# Altium PCB main_fourlayers.PcbDoc
Units mil, origin at the board's own origin, x right, y up, seen from the top; angles counter-clockwise.
Board outline 6000 x 4000 mil, 4 copper layers (Top Layer, Signal Layer 1, Signal Layer 2, Bottom Layer), stack 30.634 mil thick; 34 components, 35 nets, 218 pads, 0 vias.
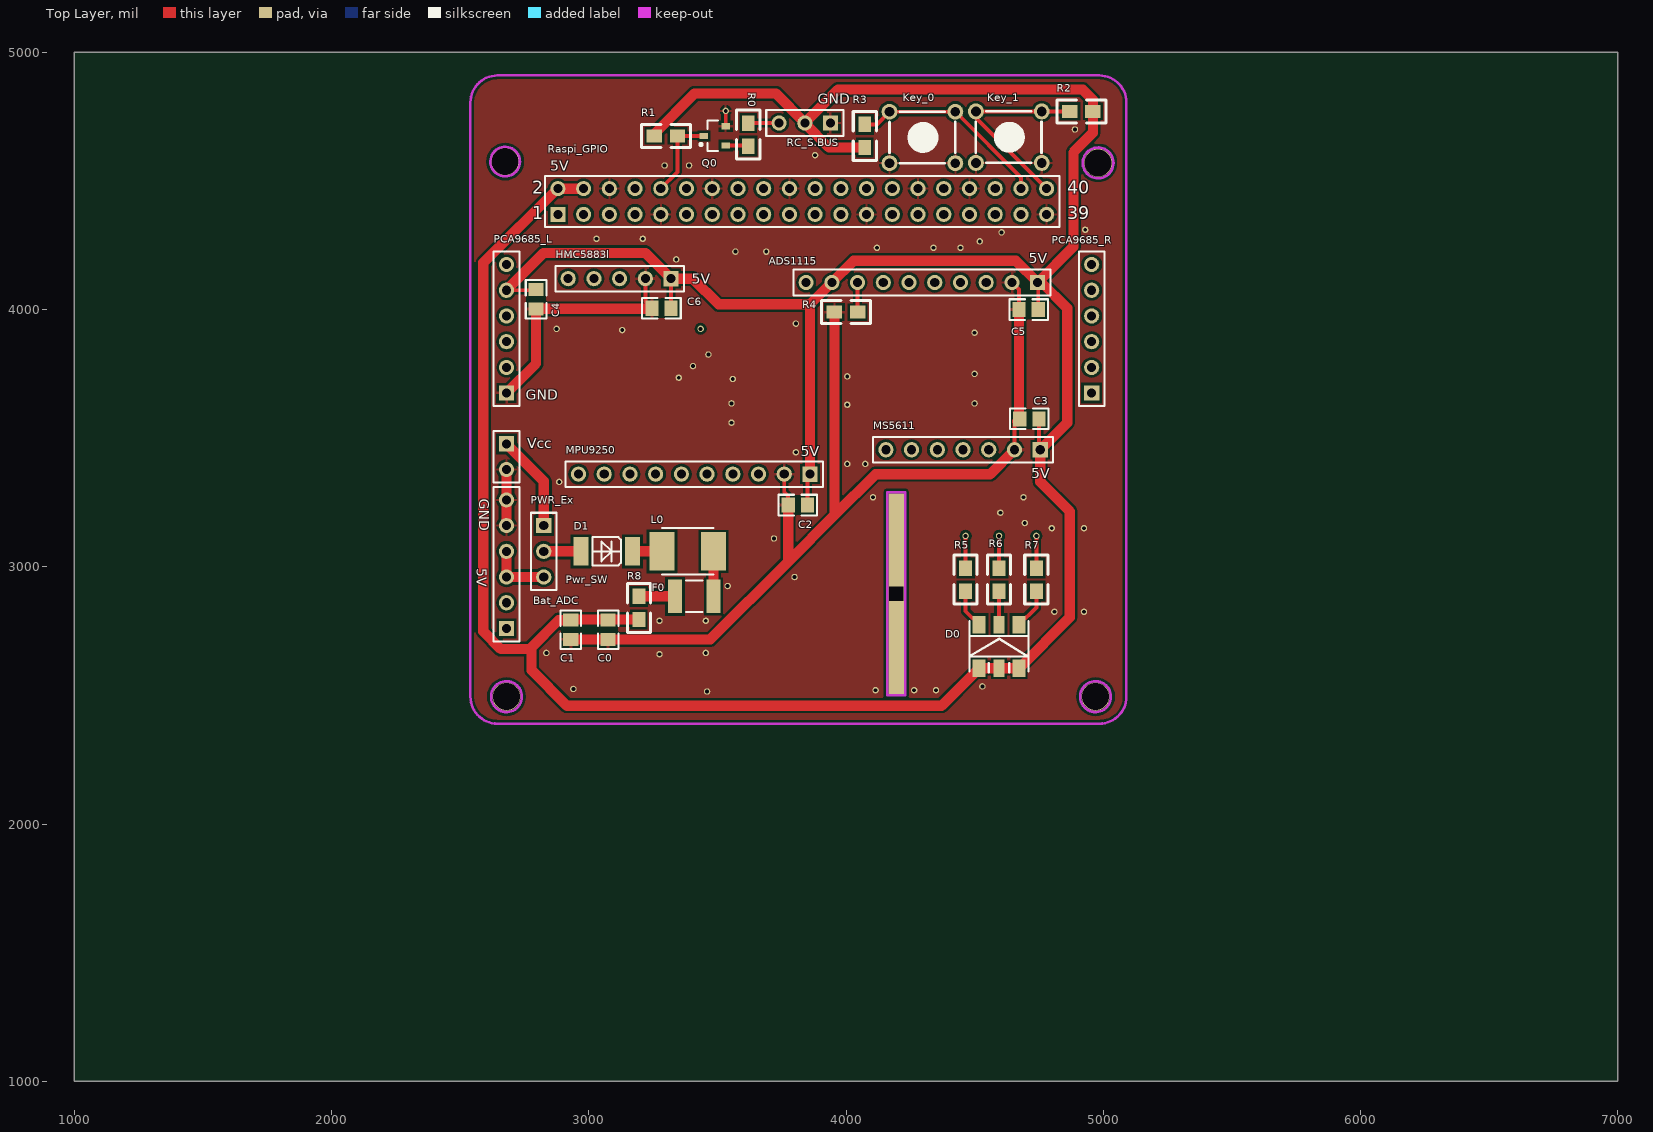
[diagram p0: Top Layer view]
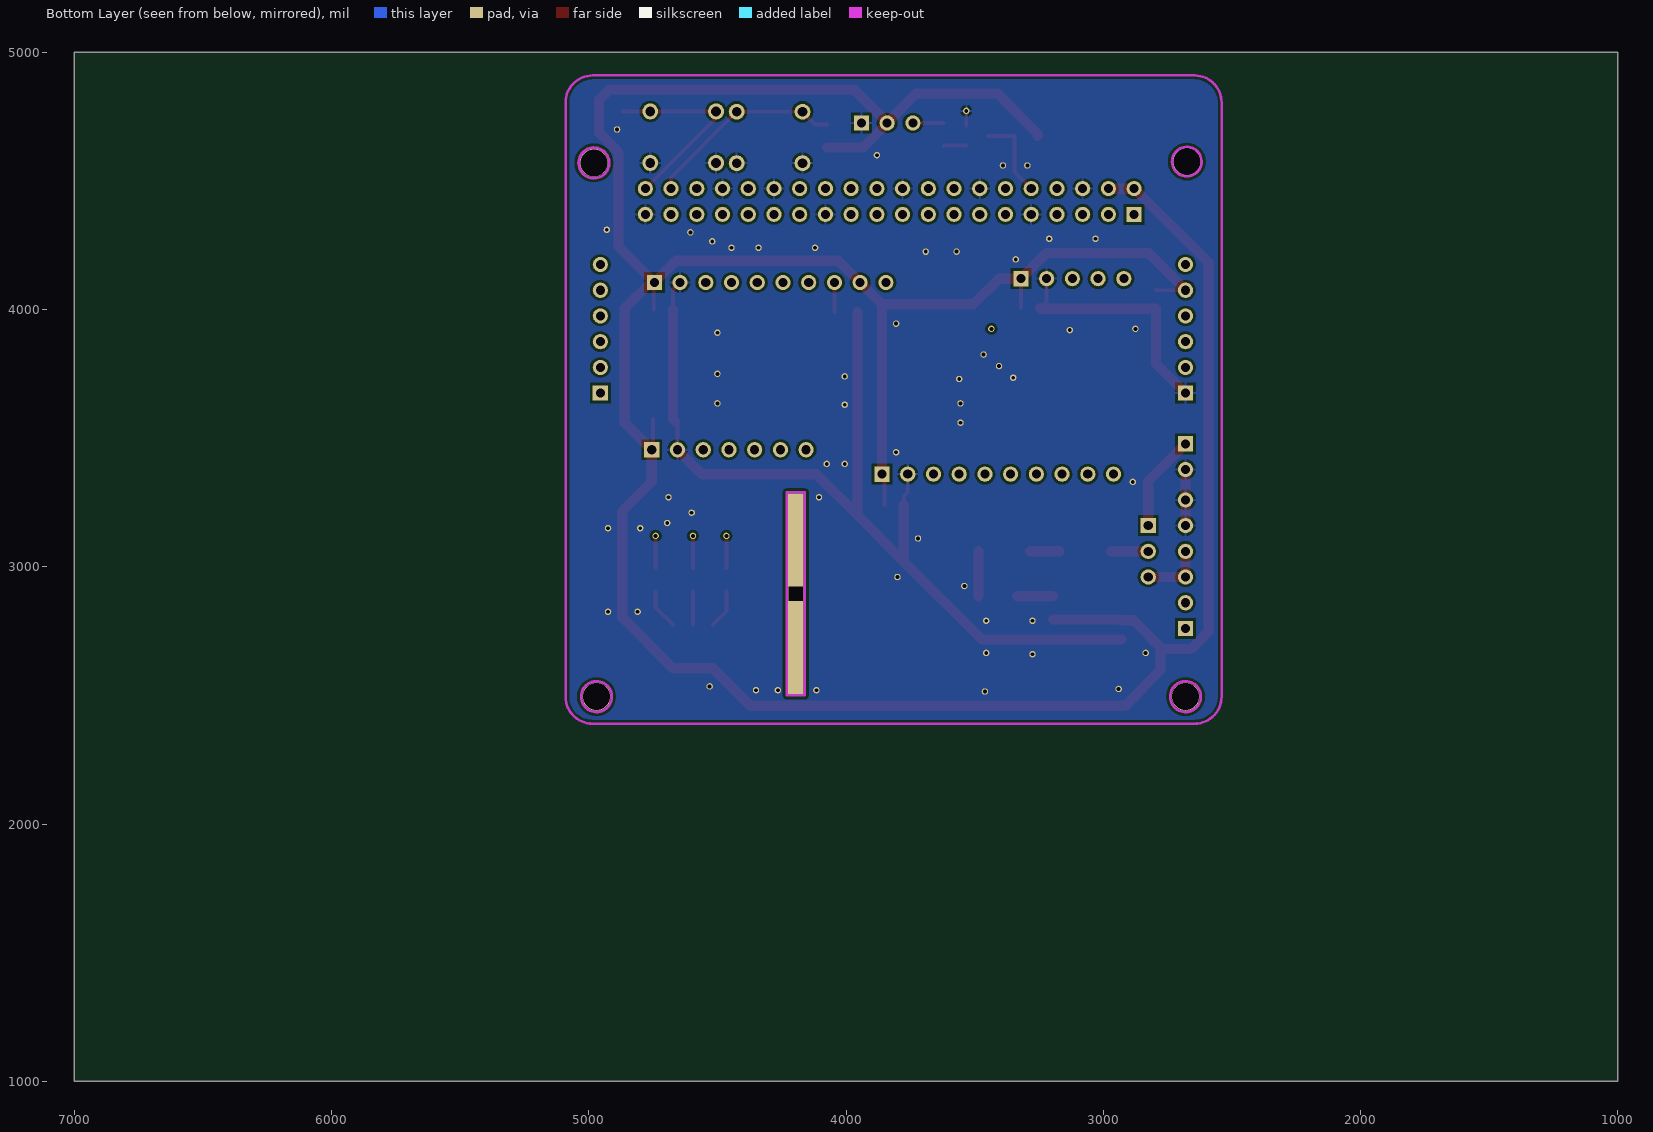
[diagram p1: Bottom Layer view, seen from below]
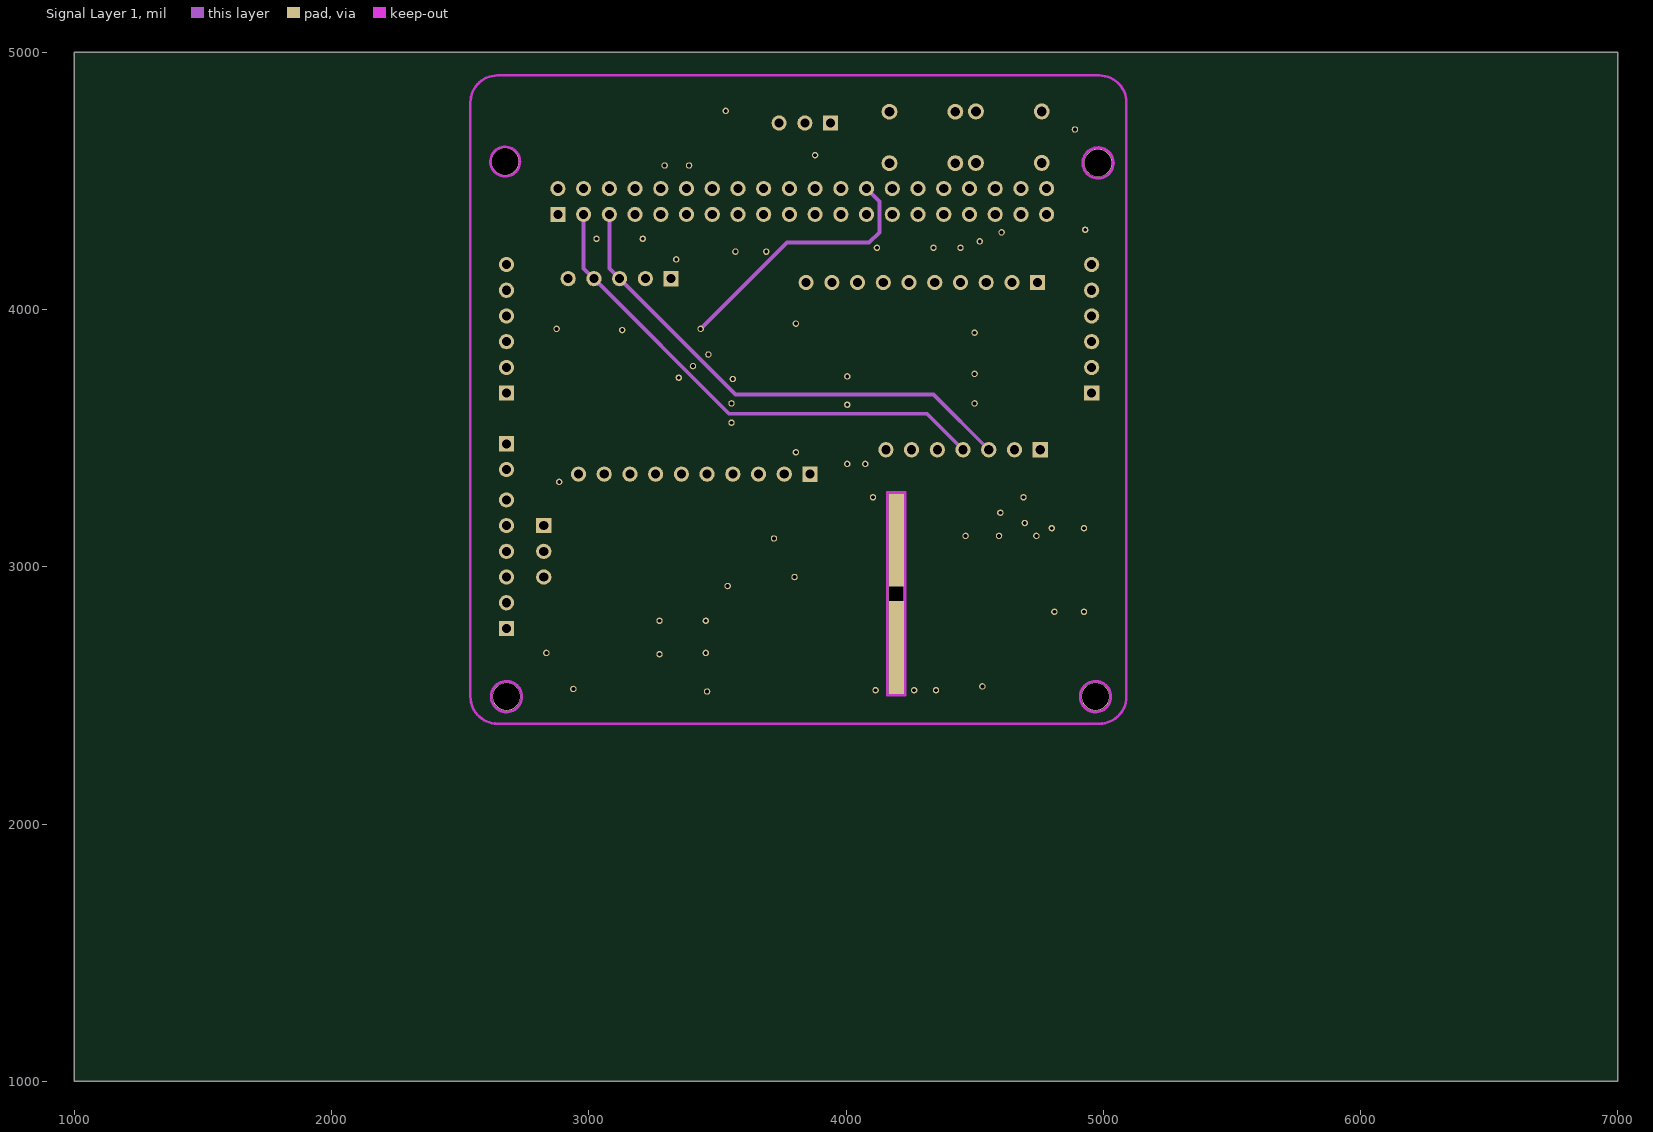
[diagram p2: Signal Layer 1]
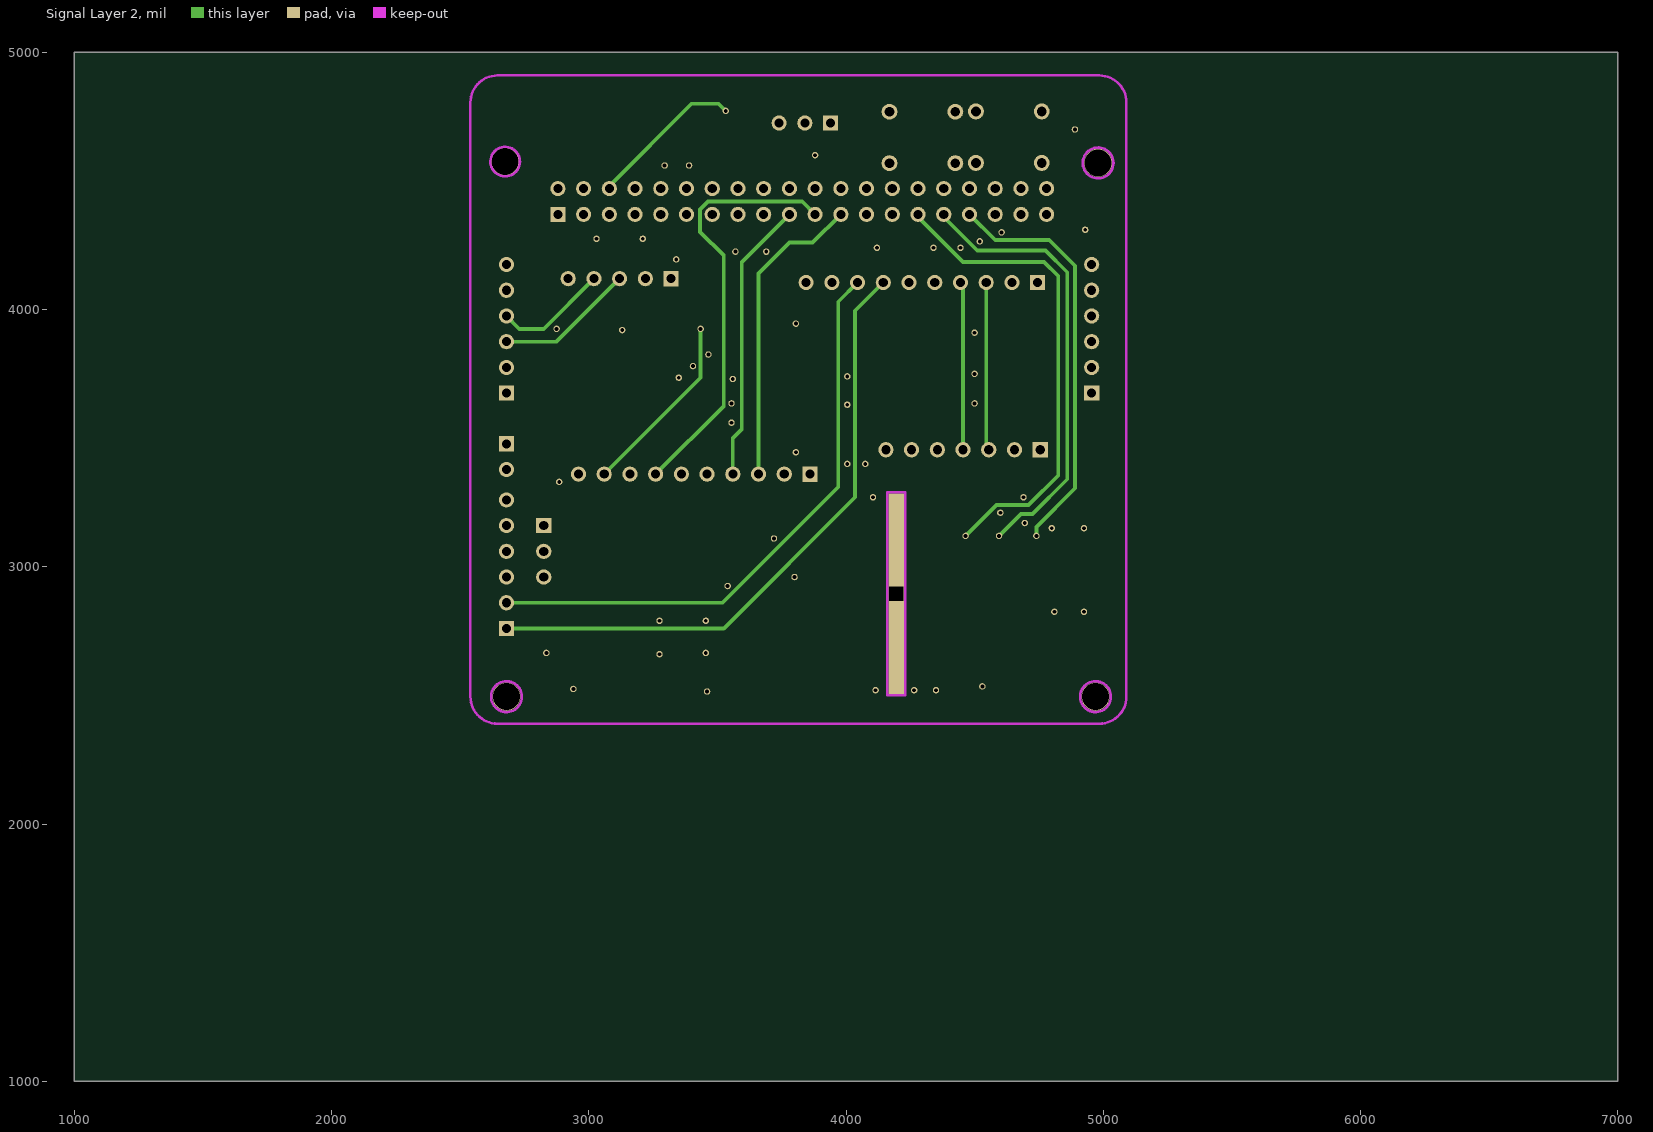
[diagram p3: Signal Layer 2]

## Layer stack, top to bottom
Top Solder: solder mask 0.4, Solder Resist, Dk 3.5
Top Layer: signal copper 1.4
Dielectric 1: core 10, FR-4, Dk 4.2
Signal Layer 1: signal copper 1.417
Dielectric 3: prepreg 5, Dk 4.2
Signal Layer 2: signal copper 1.417
Dielectric 2: core 10, Dk 4.2
Bottom Layer: signal copper 1.4
Bottom Solder: solder mask 0.4, Solder Resist, Dk 3.5

## Board outline
1000,1000 7000,1000 7000,5000 1000,5000

## Design rules (kind name [scope] priority, off if disabled: settings)
Clearance [All] p1: gap=10
PolygonConnect [All] p1: connectstyle=Relief reliefconductorwidth=10 reliefentries=4 polygonreliefangle="90 Angle" airgapwidth=10
RoutingVias [All] p1: holewidth=28 width=50 viastyle="Through Hole" minholewidth=28 minwidth=50 maxholewidth=28 maxwidth=50
SolderMaskExpansion [All] p1: expansion=4
Width [All] p1: maxlimit=50 minlimit=15 preferedwidth=15
30 further rules are at their usual default settings.

## Classes and differential pairs
component class Rpi_GPIO: Raspi_GPIO
component class Sensors: ADS1115 C2 C3 C4 C5 C6 D0 HMC5883l Key_0 Key_1 MPU9250 MS5611 PCA9685_L PCA9685_R Q0 R0 R1 R2 R3 R4 R5 R6 R7 RC_S.BUS
component class etc: Bat_ADC C0 C1 D1 F0 L0 PWR_Ex Pwr_SW R8

## Components (designator, comment, footprint, x,y, rotation, side; value= is the part's Value field where it differs from the comment)
ADS1115 "第一轮先用于测试" HDR1X10 4745,4105.05 r180 top
Bat_ADC "最好是GH接头的，但是考虑到焊接难度，还是修改电压计的线" HDR1X6 2680,2760 r90 top
C0 "Cap" 0805-1 3075,2755 r90 top
C1 "Cap" 0805-1 2930,2755 r90 top
C2 "Cap" 0805-1 3812.6,3240 r0 top
C3 "Cap" 0805-1 4712.6,3575 r0 top
C4 "Cap" 0805-1 2795,4040 r90 top
C5 "Cap" 0805-1 4710,4000 r0 top
C6 "Cap" 0805-1 3282.6,4005 r0 top
D0 "LED-RGB" LED_5050_RGB 4605,2710.35 r90 top
D1 "4007" MELF 3070,3060 r0 top
F0 "3A，如果电供不上就直接短接" 1812 3410,2885.19 r180 top
HMC5883l "" HDR1X5 3320,4120 r180 top
Key_0 "" KEY_M 4169.09,4768.95 r0 top
Key_1 "" KEY_M 4505.01,4770 r0 top
L0 "Inductor" L-SMD-3 3385,3060 r0 top
MPU9250 "Header 10" HDR1X10 3860,3360 r180 top
MS5611 "" HDR1X7 4755,3455 r180 top
PCA9685_L "Header 6" HDR1X6 2680,3675 r90 top
PCA9685_R "Header 6" HDR1X6 4955,3675 r90 top
PWR_Ex "额外电源供电，最好使用接线端子" HDR1X2 2680,3477.88 r270 top
Pwr_SW "通过跳线帽选择从飞机电池供电还是额外供电" HDR1X3 2825,3160 r270 top
Q0 "9013" SOT23_L 3490,4675 r180 top
R0 "Res2" 0805 3619.94,4635 r90 top
R1 "Res2" 0805 3345,4675 r180 top
R2 "Res2" 0805 4870,4770 r0 top
R3 "Res2" 0805 4073.15,4720 r270 top
R4 "Res2" 0805 3955,3990 r0 top
R5 "Res2" 0805 4465.06,2995 r270 top
R6 "Res2" 0805 4595.06,2995 r270 top
R7 "Res2" 0805 4740,2995 r270 top
R8 "Res2" 0805 3194.94,2795 r90 top
Raspi_GPIO "Header 20X2" HDR2X20 2880,4370 r0 top
RC_S.BUS "Header 3" HDR1X3 3940,4725 r180 top

## Footprints (in the part's own frame and the unit in brackets; to place one, negate y for a bottom-side part, rotate by r counter-clockwise, add the part's x,y. Pads: shape width x height; smd on the part's side, far side on the other; paste and mask are expansions set on the pad)
0805 [mil]
  rect 60x50 smd: 1(0,-0.06) 2(90,-0.06)
  silkscreen extent -50,-45 140,45
0805-1 [mm] "0805带丝印"
  rect 1.3x1.5 smd: 1(-0.95,0) 2(0.95,0)
  silkscreen extent -1.91,-1.02 1.91,1.02, body extent -1,-0.62 1,0.63, height 0.5
1812 [mm] "Chip Capacitor, Body 4.5x3.2mm, IPC High Density"
  rect 1.4x3.3 smd: 1(-1.9,0) 2(1.9,0)
  silkscreen extent -0.8,-1.55 0.8,1.55, body extent -2.4,-1.7 2.4,1.7, height 1.4
HDR1X2 [mm] "Connector; Header; 2 Position"
  rect 1.5x1.5 hole 0.9: 1(0,0)
  round 1.5 hole 0.9: 2(2.54,0)
  silkscreen extent -1.27,-1.27 3.81,1.27
HDR1X3 [mm] "Connector; Header; 3 Position"
  rect 1.5x1.5 hole 0.9: 1(0,0)
  round 1.5 hole 0.9: 2(2.54,0) 3(5.08,0)
  silkscreen extent -1.27,-1.27 6.35,1.27
HDR1X5 [mm] "Connector; Header; 5 Position"
  rect 1.5x1.5 hole 0.9: 1(0,0)
  round 1.5 hole 0.9: 2(2.54,0) 3(5.08,0) 4(7.62,0) 5(10.16,0)
  silkscreen extent -1.27,-1.27 11.43,1.27
HDR1X6 [mm] "Connector; Header; 6 Position"
  rect 1.5x1.5 hole 0.9: 1(0,0)
  round 1.5 hole 0.9: 2(2.54,0) 3(5.08,0) 4(7.62,0) 5(10.16,0) 6(12.7,0)
  silkscreen extent -1.27,-1.27 13.97,1.27
HDR1X7 [mm] "Connector; Header; 7 Position"
  rect 1.5x1.5 hole 0.9: 1(0,0)
  round 1.5 hole 0.9: 2(2.54,0) 3(5.08,0) 4(7.62,0) 5(10.16,0) 6(12.7,0) 7(15.24,0)
  silkscreen extent -1.27,-1.27 16.51,1.27
HDR1X10 [mm] "Connector; Header; 10 Position"
  rect 1.5x1.5 hole 0.9: 1(0,0)
  round 1.5 hole 0.9: 2(2.54,0) 3(5.08,0) 4(7.62,0) 5(10.16,0) 6(12.7,0) 7(15.24,0) 8(17.78,0) 9(20.32,0) 10(22.86,0)
  silkscreen extent -1.27,-1.27 24.13,1.27
HDR2X20 [mm] "Connector; Header; 20x2 Position"
  rect 1.5x1.5 hole 0.9: 1(0,0)
  round 1.5 hole 0.9: 2(0,2.54) 3(2.54,0) 4(2.54,2.54) 5(5.08,0) 6(5.08,2.54) 7(7.62,0) 8(7.62,2.54) 9(10.16,0) 10(10.16,2.54) 11(12.7,0) 12(12.7,2.54) 13(15.24,0) 14(15.24,2.54) 15(17.78,0) 16(17.78,2.54) 17(20.32,0) 18(20.32,2.54) 19(22.86,0) 20(22.86,2.54) 21(25.4,0) 22(25.4,2.54) 23(27.94,0) 24(27.94,2.54) 25(30.48,0) 26(30.48,2.54) 27(33.02,0) 28(33.02,2.54) 29(35.56,0) 30(35.56,2.54) 31(38.1,0) 32(38.1,2.54) 33(40.64,0) 34(40.64,2.54) 35(43.18,0) 36(43.18,2.54) 37(45.72,0) 38(45.72,2.54) 39(48.26,0) 40(48.26,2.54)
  silkscreen extent -1.27,-1.27 49.53,3.81
KEY_M [mil]
  round 62 hole 38: 1(0,0) 1(255.91,0) 2(0,-200) 2(255.91,-200)
  silkscreen extent 0,-200 255,0
L-SMD-3 [mm] "贴片电感3.8"
  rect 2.5x3.8 smd: 1(-2.54,0) 2(2.54,0)
  silkscreen extent -2.54,-2.29 2.54,2.29, body extent -2.54,-1.91 2.54,1.91, height 4
LED_5050_RGB [mm]
  rect 1.7x1.25 smd: A(-2.658,-1.721) A(-2.658,2.229)
  rect 1.7x1.1 smd: A(-2.658,0.254) K2(1.642,0.254)
  rect 1.7x1.3 smd: K1(1.642,2.229) K3(1.642,-1.721)
  silkscreen extent -3.05,-2.67 1.99,3.17
MELF [mm] "贴片二极管"
  rect 1.5x2.8 smd: 1(-2.54,0) 2(2.54,0)
  silkscreen extent -1.4,-1.4 1.4,1.4
SOT23_L [mm] "SOT23, 3-Leads, Body 2.9x1.3mm, Pitch 0.95mm, Lead Span 2.3mm - Reverse Pinning, IPC High Density"
  rect 0.85x0.6 smd: 1(1.075,0) 2(-1.075,-0.95) 3(-1.075,0.95)
  silkscreen extent -0.3,-1.5 1.47,1.5, body extent -0.7,-1.5 0.7,1.5, height 1.1

## Part data
ADS1115: library part "Header 10", "Header, 10-Pin"
Bat_ADC: library part "Header 6", "Header, 6-Pin"
C0 C1 C2 C3 C4 C5 C6: "Capacitor"
D0: "三基色LED"
D1: library part "Diode 1N4004", "1 Amp General Purpose Rectifier"
F0: library part "Fuse 2", "Fuse"
HMC5883l: library part "Header 5", "Header, 5-Pin"
Key_0 Key_1: library part KEY_M
MPU9250: "Header, 10-Pin"
MS5611: library part "Header 7", "Header, 7-Pin"
PCA9685_L PCA9685_R: "Header, 6-Pin"
PWR_Ex: library part "Header 2", "Header, 2-Pin"
Pwr_SW: library part "Header 3", "Header, 3-Pin"
Q0: library part 2N3904, "NPN General Purpose Amplifier"
R0 R1 R2 R3 R4 R5 R6 R7 R8: "Resistor"
Raspi_GPIO: "Header, 20-Pin, Dual row"
RC_S.BUS: "Header, 3-Pin"

## Free pads (board coordinates)
  round 110 hole 105 unplated: 7(2675,4575) 7(2680,2495) 7(4970,2495) 7(4980,4570)
  rect 60x780 hole 55 square unplated: 8(4195,2895)
  round 25 hole 15: 9(2835,2665) 9(2875,3925) 9(2885,3330) 9(2940,2525) 9(3030,4275) 9(3130,3920) 9(3210,4275) 9(3275,2660) 9(3275,2790) 9(3295,4560) 9(3340,4195) 9(3350,3735) 9(3390,4560) 9(3405,3780) 9(3435,3925) 9(3455,2665) 9(3455,2790) 9(3460,2515) 9(3465,3825) 9(3540,2925) 9(3555,3560) 9(3555,3635) 9(3560,3730) 9(3570,4225) 9(3690,4225) 9(3720,3110) 9(3800,2960) 9(3805,3445) 9(3805,3945) 9(4005,3400) 9(4005,3630) 9(4005,3740) 9(4075,3400) 9(4105,3270) 9(4115,2520) 9(4120,4240) 9(4265,2520) 9(4340,4240) 9(4350,2520) 9(4445,4240) 9(4500,3635) 9(4500,3750) 9(4500,3910) 9(4520,4265) 9(4530,2535) 9(4600,3210) 9(4605,4300) 9(4690,3270) 9(4695,3170) 9(4800,3150) 9(4810,2825) 9(4890,4700) 9(4925,2825) 9(4925,3150) 9(4930,4310) 10(3532.32,4772.32) 10(4465,3120) 10(4595,3120) 10(4740,3120)
  round 25 hole 15 paste+0: 9(3880,4600)

## Nets (pads, with @x,y where several pads share a name; then routed paths per layer and width w, separated by ;. In a path a pad name is that pad's centre, name@x,y a point inside that pad or via, vN(x,y) a via of type N, cw(c..) or ccw(c..) an arc to the next point about the centre after c; other vN are vias at no path point)
3V3: Raspi_GPIO.1
BACKUP_1: Raspi_GPIO.11
BACKUP_2: Raspi_GPIO.13
CUR_5: ADS1115.8 Bat_ADC.2 R4.2 | length 2417.6
  Top Layer w15: R4.2 ADS1115.8
  Signal Layer 2 w15: Bat_ADC.2 3520,2860 3970,3310 3970,4030.05 ADS1115.8
GND: ADS1115.2 Bat_ADC.5 Bat_ADC.6 C0.1 C1.1 C2.1 C3.1 C4.1 C5.1 C6.1 HMC5883l.2 Key_0.2 Key_1.2 MPU9250.2 MS5611.2 pad.9@2835,2665 pad.9@2875,3925 pad.9@2885,3330 pad.9@2940,2525 pad.9@3030,4275 pad.9@3130,3920 pad.9@3210,4275 pad.9@3275,2660 pad.9@3275,2790 pad.9@3295,4560 pad.9@3340,4195 pad.9@3350,3735 pad.9@3390,4560 pad.9@3405,3780 pad.9@3455,2665 pad.9@3455,2790 pad.9@3460,2515 pad.9@3465,3825 pad.9@3540,2925 pad.9@3555,3560 pad.9@3555,3635 pad.9@3560,3730 pad.9@3570,4225 pad.9@3690,4225 pad.9@3720,3110 pad.9@3800,2960 pad.9@3805,3445 pad.9@3805,3945 pad.9@3880,4600 pad.9@4005,3400 pad.9@4005,3630 pad.9@4005,3740 pad.9@4075,3400 pad.9@4105,3270 pad.9@4115,2520 pad.9@4120,4240 pad.9@4265,2520 pad.9@4340,4240 pad.9@4350,2520 pad.9@4445,4240 pad.9@4500,3635 pad.9@4500,3750 pad.9@4500,3910 pad.9@4520,4265 pad.9@4530,2535 pad.9@4600,3210 pad.9@4605,4300 pad.9@4690,3270 pad.9@4695,3170 pad.9@4800,3150 pad.9@4810,2825 pad.9@4890,4700 pad.9@4925,2825 pad.9@4925,3150 pad.9@4930,4310 pad.10@3532.32,4772.32 PCA9685_L.1 PWR_Ex.2 Q0.2 R4.1 Raspi_GPIO.6 Raspi_GPIO.9 Raspi_GPIO.14 Raspi_GPIO.20 Raspi_GPIO.25 Raspi_GPIO.30 Raspi_GPIO.34 Raspi_GPIO.39 RC_S.BUS.1 | length 5671.6
  Top Layer w15: HMC5883l.2 3220,4030.2 C6.1 ; Q0.2 pad.10@3532.32,4772.32 ; MPU9250.2 3760,3290 3775.2,3274.8 C2.1 ; ADS1115.2 4672.6,4077.46 C5.1 ; MS5611.2 4655,3554.8 C3.1@4665.1,3564.9
  Top Layer w40: Bat_ADC.5 Bat_ADC.6 PWR_Ex.2 ; PCA9685_L.1 2795,3790 C4.1 3242.79,4002.6 C6.1 ; C1.1 C0.1 3472.79,2717.6 3775.2,3020 ; C2.1 3775.2,3020 ; R4.1 3955,3199.8 ; MS5611.2 4560,3360 4115.2,3360 3955,3199.8 ; C3.1@4665.1,3564.9 4672.6,3572.4 C5.1 ; 3775.2,3020 3955,3199.8
  Signal Layer 2 w15: Raspi_GPIO.6 3080,4480 3400,4800 3504.64,4800 pad.10@3532.32,4772.32
I2C_SCL: ADS1115.3 HMC5883l.3 MS5611.3 PCA9685_L.3 Raspi_GPIO.5 | length 3172.7
  Signal Layer 1 w15: Raspi_GPIO.5 3080,4160 HMC5883l.3 3570,3670 4340,3670 MS5611.3
  Signal Layer 2 w15: PCA9685_L.3 2875,3875 HMC5883l.3 ; ADS1115.3 4545,3465 MS5611.3
I2C_SDA: ADS1115.4 HMC5883l.4 MS5611.4 PCA9685_L.4 Raspi_GPIO.3 | length 3072.7
  Signal Layer 1 w15: Raspi_GPIO.3 2980,4160 HMC5883l.4 3545,3595 4315,3595 MS5611.4
  Signal Layer 2 w15: PCA9685_L.4 2730,3925 2825,3925 HMC5883l.4 ; ADS1115.4 4455,4095.05 MS5611.4
KEY_0: Key_0.1 R3.1 Raspi_GPIO.38 | length 776.8
  Top Layer w15: R3.1 4120.15,4720 4169.09,4768.95 4425,4768.95 4680,4513.95 Raspi_GPIO.38
KEY_1: Key_1.1 R2.1 Raspi_GPIO.40 | length 778.9
  Top Layer w15: Raspi_GPIO.40 4505.01,4744.99 4505.01,4770 4760.92,4770 4869.94,4770 R2.1
LED_B: pad.10@4465,3120 R5.1 Raspi_GPIO.29 | length 2007.6
  Top Layer w15: R5.1 pad.10@4465,3120
  Signal Layer 2 w15: Raspi_GPIO.29 4280,4360 4455,4185 4770,4185 4825,4130 4825,3355 4710,3240 4585,3240 pad.10@4465,3120
LED_G: pad.10@4740,3120 R7.1 Raspi_GPIO.33 | length 1724.9
  Top Layer w15: R7.1 pad.10@4739.94,3114.94
  Signal Layer 2 w15: Raspi_GPIO.33 4580,4270 4790,4270 4890,4170 4890,3305 4740,3155 pad.10@4740,3120
LED_R: pad.10@4595,3120 R6.1 Raspi_GPIO.31 | length 1865.2
  Top Layer w15: R6.1 pad.10@4595,3120
  Signal Layer 2 w15: Raspi_GPIO.31 4380,4360 4510,4230 4775,4230 4860,4145 4860,3340 4725,3205 4680,3205 pad.10@4595,3120
MPU9250_CS: MPU9250.9 pad.9@3435,3925 Raspi_GPIO.26 | length 1761.4
  Signal Layer 1 w15: pad.9@3435,3925 3770,4260 4090,4260 4130,4300 4130,4420 Raspi_GPIO.26
  Signal Layer 2 w15: MPU9250.9 3435,3735 pad.9@3435,3925
MPU9250_INT: Raspi_GPIO.16
NetD0_1: D0.K1 R5.2 | length 151.6
  Top Layer w15: R5.2 4465,2827.24 D0.K1
NetD0_3: D0.K2 R6.2 | length 130
  Top Layer w15: D0.K2 R6.2
NetD0_4: D0.K3 R7.2 | length 157.8
  Top Layer w15: D0.K3 4739.94,2842.18 R7.2
NetD1_1: D1.1 Pwr_SW.2 | length 145
  Top Layer w40: Pwr_SW.2 D1.1
NetD1_2: D1.2 L0.1 | length 115
  Top Layer w40: D1.2 L0.1
NetF0_1: F0.1 L0.2 | length 174.9
  Top Layer w40: F0.1 3485,2885.38 L0.2
NetF0_2: F0.2 R8.2 | length 140.3
  Top Layer w40: R8.2 3195.19,2885.19 F0.2
NetQ0_2: Q0.3 R0.1 | length 88.8
  Top Layer w15: Q0.3 3617.4,4637.6 R0.1
PPM_DECODE: Raspi_GPIO.7
RPI_PWM: Raspi_GPIO.12
SBUS_IN: R0.2 RC_S.BUS.3 | length 120
  Top Layer w15: R0.2 RC_S.BUS.3
SCLK_9250: MPU9250.3 Raspi_GPIO.23 | length 1195.3
  Signal Layer 2 w15: MPU9250.3 3660,4140 3780,4260 3870,4260 Raspi_GPIO.23
SDI_9250: MPU9250.4 Raspi_GPIO.19 | length 1101.1
  Signal Layer 2 w15: MPU9250.4 3560,3500 3595,3535 3595,4185 Raspi_GPIO.19
SDO_9250: MPU9250.7 Raspi_GPIO.21 | length 1657.7
  Signal Layer 2 w15: MPU9250.7 3525,3625 3525,4210 3432.97,4302.03 3432.97,4389.48 3463.49,4420 3830,4420 Raspi_GPIO.21
UBLOX_CS: Raspi_GPIO.24
USART_RX: Q0.1 R1.1 Raspi_GPIO.10 | length 334.7
  Top Layer w15: Raspi_GPIO.10 3345,4535 R1.1 3447.61,4675.06 Q0.1
USART_TX: Raspi_GPIO.8
V_BATEX: PWR_Ex.1 Pwr_SW.1 | length 377.9
  Top Layer w40: PWR_Ex.1 2825,3332.88 Pwr_SW.1
V_UBEC: Bat_ADC.3 Bat_ADC.4 Pwr_SW.3 | length 245
  Top Layer w40: Bat_ADC.4 Bat_ADC.3 Pwr_SW.3
VCC: ADS1115.1 ADS1115.9 C0.2 C1.2 C2.2 C3.2 C4.2 C5.2 C6.2 D0.A HMC5883l.1 MPU9250.1 MS5611.1 PCA9685_L.5 R1.2 R2.2 R3.2 R8.1 Raspi_GPIO.2 Raspi_GPIO.4 RC_S.BUS.2 | length 12979.7
  Top Layer w15: PCA9685_L.5 2792.6,4075 C4.2 ; C6.2 HMC5883l.1 ; C2.2 3850,3350 MPU9250.1 ; ADS1115.1 4747.4,4102.65 C5.2 ; C3.2 4750,3460 MS5611.1
  Top Layer w40: PCA9685_L.5 2825,4220 3220,4220 HMC5883l.1 3405,4120 3505,4020 3859.95,4020 ; Raspi_GPIO.4 Raspi_GPIO.2 2878.52,4470 2590,4181.48 2590,2748.52 2658.52,2680 2770,2680 2777.57,2687.57 ; R8.1 2932.6,2795 C1.2 2882.4,2792.4 2777.57,2687.57 ; R1.2 3255,4682.49 3412.51,4840 3726.48,4840 RC_S.BUS.2@3840,4726.48 ; MPU9250.1 3860,4019.95 3859.95,4020 ; R3.2 3933.52,4630 3840,4723.52 RC_S.BUS.2 RC_S.BUS.2@3840,4726.48 ; 2777.57,2687.57 2777.57,2597.43 2915,2460 4371.54,2460 4517.24,2605.71 4595,2605.71 4672.76,2605.71 4870,2802.95 4870,3215 4755,3330 MS5611.1 4860,3560 4860,4005 4759.95,4105.05 ADS1115.1 ; RC_S.BUS.2@3840,4726.48 3968.52,4855 4920,4855 4960,4815 R2.2 4960,4686.65 4884.18,4610.83 4884.18,4244.23 ADS1115.1 ; 3859.95,4020 ADS1115.9 4029.95,4190 4660.05,4190 ADS1115.1
VOL_5: ADS1115.7 Bat_ADC.1 | length 2446.9
  Signal Layer 2 w15: Bat_ADC.1 3525,2760 4035,3270 4035,3995.05 ADS1115.7
pads on no net: ADS1115.5 ADS1115.6 ADS1115.10 HMC5883l.5 MPU9250.5 MPU9250.6 MPU9250.8 MPU9250.10 MS5611.5 MS5611.6 MS5611.7 PCA9685_L.2 PCA9685_L.6 PCA9685_R.1 PCA9685_R.2 PCA9685_R.3 PCA9685_R.4 PCA9685_R.5 PCA9685_R.6 Raspi_GPIO.15 Raspi_GPIO.17 Raspi_GPIO.18 Raspi_GPIO.22 Raspi_GPIO.27 Raspi_GPIO.28 Raspi_GPIO.32 Raspi_GPIO.35 Raspi_GPIO.36 Raspi_GPIO.37

## Polygon pours and split planes (outlines as drawn)
GND on Bottom Layer "Mechanical 1-No Net" (solid, pour order 14): 2540,4910 5090,4910 5090,2390 2540,2390 2540,4910
GND on Top Layer "Mechanical 1-No Net" (solid, pour order 16): 2540,4910 2535,4905 2535,2395 2535,2390 5090,2390 5090,4910

## Keep-outs
Keep-Out Layer:
  circle w10: c4970,2495 r60
  circle w10: c2680,2495 r60
  circle w10: c4980,4570 r60
  lines w10: 2732.44,4579.42 ccw(c2675,4575) 2732.61,4574.92 ; 2540,2495 ccw(c2645,2495) 2645,2390 4985,2390 ccw(c4985,2495) 5090,2495 5090,3680 5090,4805 ccw(c4985,4805) 4985,4910 2645,4910 ccw(c2645,4805) 2540,4805 2540,2495 ; 4160,2500 4160,3290 4230,3290 4230,2500 4160,2500

## Silkscreen, mask and mechanical layers (free items; w line width, h text height)
Top Overlay:
  text "GND" at 3890,4800 h40
  text "5V" at 2850,4540 h40
  text "5V" at 4710,4180 h40
  text "5V" at 3400,4100 h40
  text "GND" at 2755,3650 h40
  text "Vcc" at 2760,3460 h40
  text "5V" at 3825,3430 h40
  text "5V" at 4720,3345 h40
  text "GND" at 2575,3265 h40 r270
  text "5V" at 2565,2995 h40 r270

## Text inside footprints (layer, text, board x,y; h text height)
Raspi_GPIO: Top Overlay "1" at 2780,4350 h50; Top Overlay "2" at 2780,4450 h50; Top Overlay "40" at 4860,4450 h50; Top Overlay "39" at 4860,4350 h50